# EAGLE board brick_i2c_3axis (EAGLE 7.2.0)
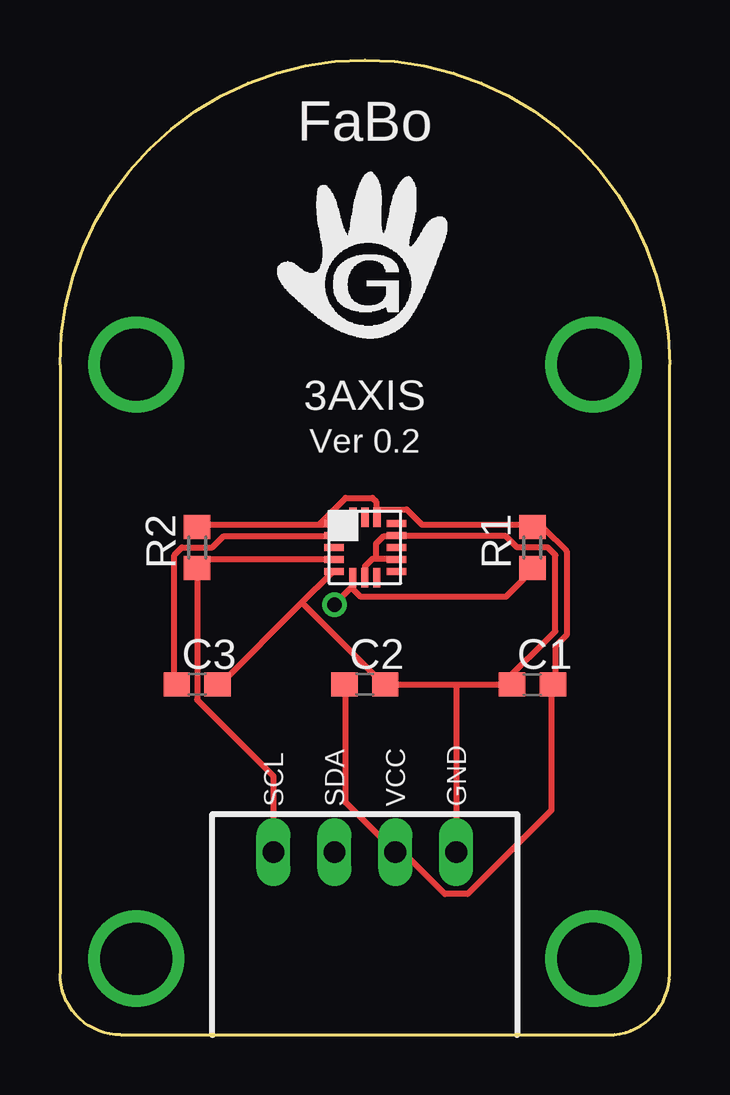
[diagram p0: board, top side]
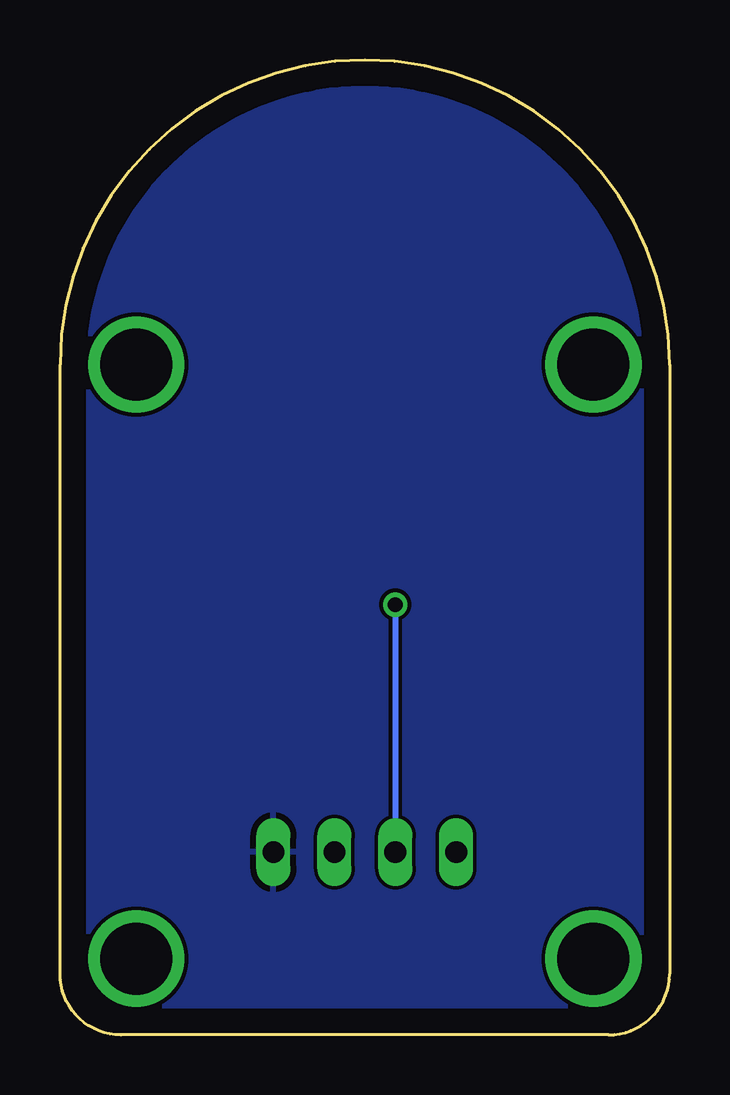
[diagram p1: board, bottom side, seen from below]

Size 25.4 x 40.64 mm. Coordinates in mm from the lower left corner, seen from the top.
Copper layers (1*16): Top 0.035mm / dielectric 1.5mm / Bottom 0.035mm
Design rules "default *": minimum track width 10mil, minimum drill 24mil, track to track 6mil, track to pad 6mil, pad to pad 6mil, via to via 6mil, smd to smd 6mil, copper to edge 40mil, drill to drill 8mil, minimum pad ring 10mil, minimum via ring 8mil, stop-mask expansion 4mil, vias tented up to drill 0mil, thermal gap 10mil

## Footprints (pad centres in the part's own frame; a part is rotated, then mirrored left to right if it is on the bottom)
C0603 = smd 1.1 x 1: 1 -0.85,0; 2 0.85,0
BRICK_I2C = drill 0.9 long: GND 3.81,-12.7; SCL -3.81,-12.7; SDA -1.27,-12.7; VCC 1.27,-12.7 | drill 3 pad 3.81: P$5 -9.525,7.62; P$6 9.525,7.62; P$7 -9.525,-17.145; P$8 9.525,-17.145
FREESCALE-MMA8451Q = smd 0.813 x 0.305: 1 -1.28,1; 2 -1.28,0.5; 3 -1.28,0; 4 -1.28,-0.5; 5 -1.28,-1; 9 1.32,-1; 10 1.32,-0.5; 11 1.32,0; 12 1.32,0.5; 13 1.32,1 | smd 0.305 x 0.813: 6 -0.5,-1.26; 7 0,-1.26; 8 0.5,-1.26; 14 0.51,1.26; 15 0.01,1.26; 16 -0.49,1.26
R0603 = smd 1 x 1.1: 1 -0.85,0; 2 0.85,0

## Placement (x,y rotation side)
C1  4.7uf  [C0603]  19.68,14.61 180 top
C2  0.1uf  [C0603]  12.7,14.61 0 top
C3  0.1uf  [C0603]  5.71,14.61 0 top
J1  BRICK_I2C  [BRICK_I2C]  12.7,20.32 0 top
MMA1  FREESCALE-MMA8451Q  [FREESCALE-MMA8451Q]  12.7,20.32 0 top
R1  4.7K  [R0603]  19.68,20.32 90 top
R2  4.7K  [R0603]  5.71,20.32 90 top

## Library data of the parts
C1-C3 = resistor
J1 = gclue
MMA1 = gclueSensor
R1 R2 = adafruit

## Nets
+3V3: C1.1 C2.1 J1.VCC MMA1.1 MMA1.14 R1.2 R2.2
GND: C1.2 C2.2 C3.2 J1.GND MMA1.5 MMA1.7 MMA1.10 MMA1.12
N$1: C3.1 MMA1.2
SCL: J1.SCL MMA1.4 R2.1
SDA: J1.SDA MMA1.6 R1.1

## Tracks (layer width: path | path; a pad name or v marks a point on that pad's centre or on a via)
+3V3
  Top 0.254: C2.1 11.91,14.61 11.91,9.68 J1.VCC 14.29,7.62 16.03,5.87 16.99,5.87 20.48,9.37 20.48,14.61 C1.1 20.64,14.61 20.64,16.19 21.11,16.67 21.11,20.16 20.16,21.11 19.68,21.11 R1.2 19.68,21.27 15.08,21.27 14.45,21.91 13.18,21.91 | 10.79,21.27 5.71,21.27 R2.2 | 10.79,21.27 11.27,21.27 MMA1.1 | 13.18,21.91 13.18,22.23 13.02,22.38 11.91,22.38 10.79,21.27 | 13.18,21.91 13.18,21.59 MMA1.14 13.18,21.91
GND
  Top 0.254: MMA1.7 12.7,19.53 13.02,19.84 13.18,19.84 | 13.18,19.84 13.97,19.84 MMA1.10 | 13.18,19.84 13.18,20.48 13.49,20.8 13.97,20.8 MMA1.12 14.13,20.8 18.57,20.8 19.05,20.32 20.32,20.32 20.64,20 20.64,16.83 18.41,14.61 | 10.08,18.02 6.67,14.61 C3.2 | 10.08,18.02 11.27,19.21 MMA1.5 | 10.08,18.02 13.49,14.61 C2.2 16.51,14.61 | 16.51,14.61 18.41,14.61 | 18.41,14.61 C1.2 18.73,14.61 | 16.51,14.61 J1.GND
  pour Bottom: -0.64,41.27 26.04,41.27 26.04,-0.63 -0.64,-0.63
N$1
  Top 0.254: MMA1.2 11.27,20.8 6.83,20.8 6.35,20.32 5.08,20.32 4.76,20 4.76,14.61 C3.1
SCL
  Top 0.254: MMA1.4 11.27,19.84 6.03,19.84 5.71,19.53 R2.1 5.71,13.97 8.89,10.8 J1.SCL
SDA  (via drill 0.61)
  Top 0.254: 12.22,18.73 12.22,18.57 12.54,18.26 18.57,18.26 19.68,19.37 R1.1 | 12.22,18.73 12.22,19.05 MMA1.6 12.22,18.73 | 12.22,18.73 v11.43,17.94
  Bottom 0.254: v11.43,17.94 J1.SDA

## Text on the board
tPlace: 3AXIS | Ver 0.2